# Altium PCB ImageSignalProcessor.PcbDoc
Units mil, origin at the board's own origin, x right, y up, seen from the top; angles counter-clockwise.
Board outline 4420 x 3000 mil, 2 copper layers (Top Layer, Bottom Layer); 17 components, 63 nets, 234 pads, 418 vias.
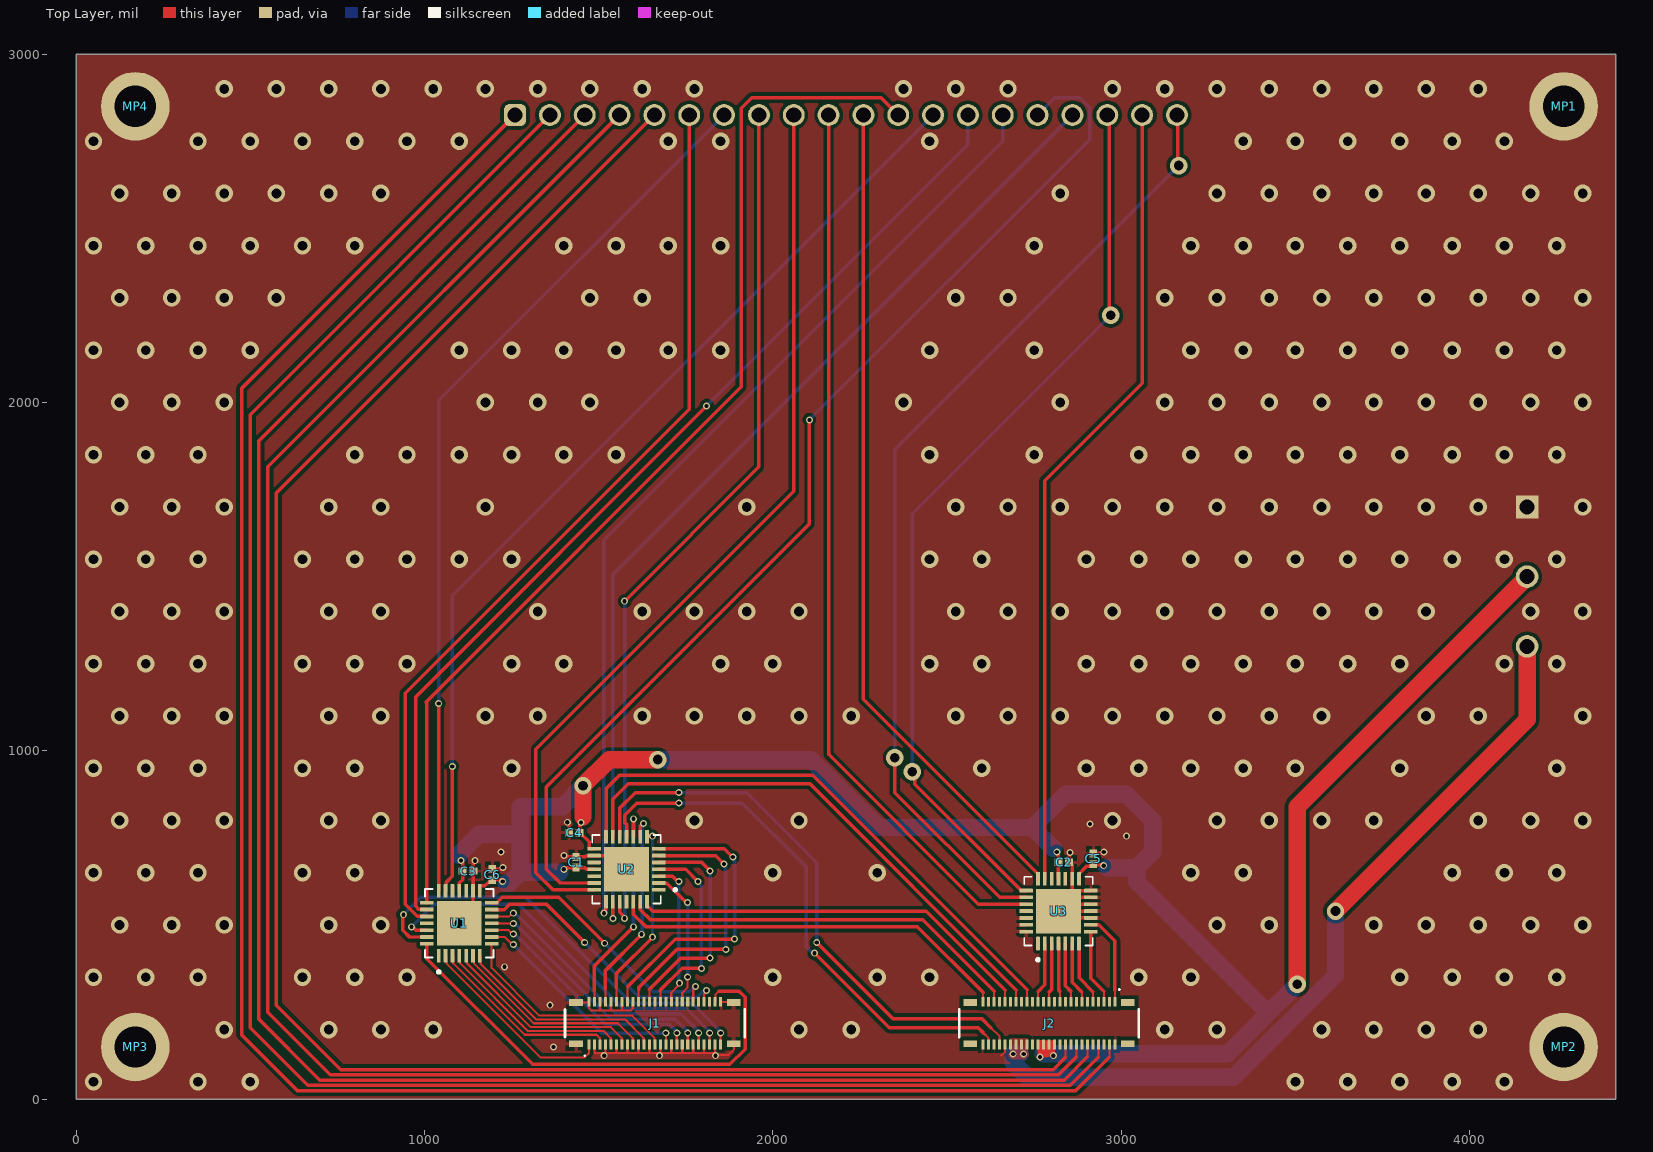
[diagram p0: Top Layer view]
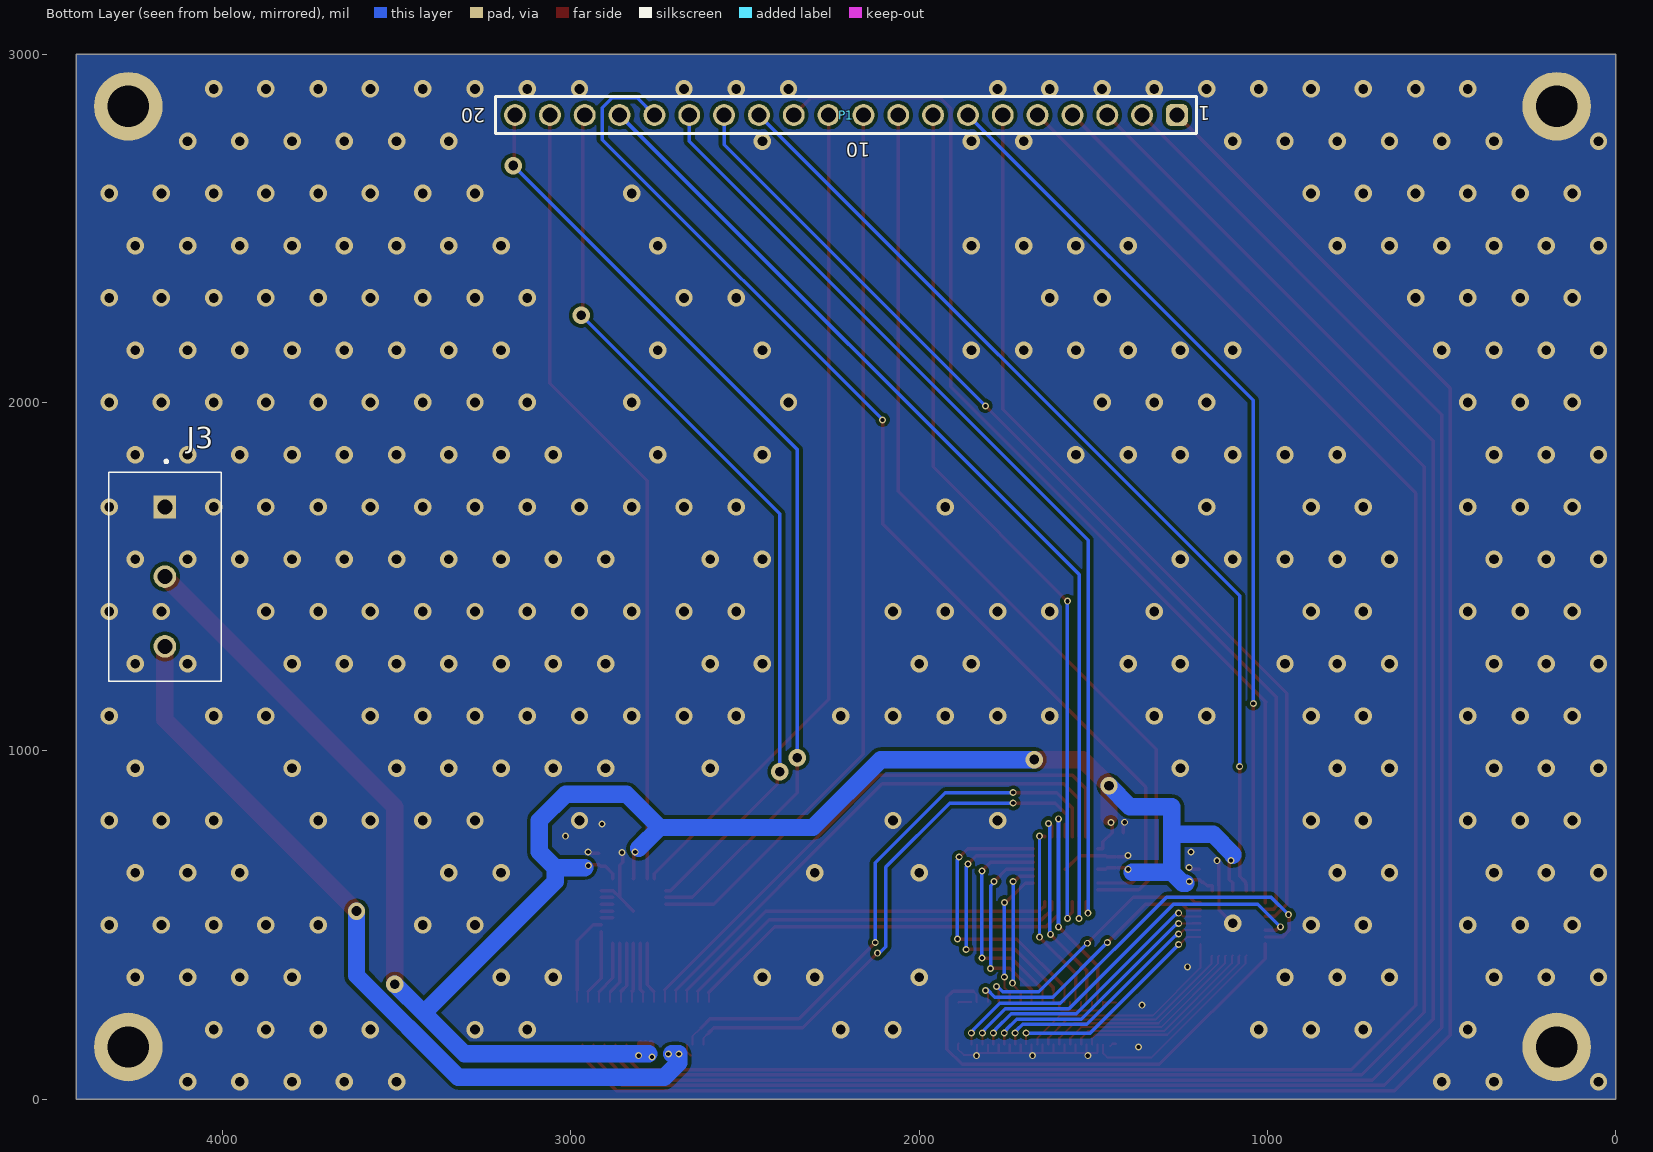
[diagram p1: Bottom Layer view, seen from below]

## Layer stack, top to bottom
Top Solder: solder mask 0.4, Solder Resist, Dk 3.5
Top Layer: signal copper 1.4
Dielectric 1: dielectric 12.6, FR-4, Dk 4.8
Bottom Layer: signal copper 1.4
Bottom Solder: solder mask 0.4, Solder Resist, Dk 3.5

## Board outline
0,0 0,3000 4420,3000 4420,0

## Design rules (kind name [scope] priority, off if disabled: settings)
Clearance [All] p1: gap=10 ignorepadtopadclearanceinfootprint=FALSE except(0: Arc-Hole Track-Hole SMDPad-Hole THPad-Hole Via-Hole Fill-Hole Poly-Hole Region-Hole Text-Hole; 5: Arc-Arc Arc-Track Track-Track SMDPad-SMDPad; 8: Arc-SMDPad Track-SMDPad; 13: Arc-THPad Track-THPad; 20: SMDPad-THPad)
HoleSize [All] p1: absolutevalues=TRUE maxlimit=248.03 minlimit=0.98 maxpercent=80.000 minpercent=20.000
MinimumSolderMaskSliver [All] p1: minsoldermaskwidth=3.15
PlaneClearance [All] p1: clearance=5
PlaneConnect [All] p1: planeconnectstyle=Direct reliefexpansion=20 reliefentries=4 reliefconductorwidth=10 reliefairgap=10
PolygonConnect PolygonConnect_5V [InNet('+5')] p1: connectstyle=Direct reliefconductorwidth=10 reliefentries=4 polygonreliefangle="90 Angle" airgapwidth=10
PolygonConnect PolygonConnect_VCC [InNet('VCC')] p2: connectstyle=Direct reliefconductorwidth=10 reliefentries=4 polygonreliefangle="90 Angle" airgapwidth=10
PolygonConnect PolygonConnect_GND [InNet('GND')] p3: thpad.connectstyle=Direct thpad.reliefconductorwidth=10 thpad.reliefentries=4 thpad.polygonreliefangle="90 Angle" thpad.airgapwidth=10 smdpad.connectstyle=Relief smdpad.reliefconductorwidth=10 smdpad.reliefentries=4 smdpad.polygonreliefangle="90 Angle" smdpad.airgapwidth=10 via.connectstyle=Direct via.reliefconductorwidth=10 via.reliefentries=4 via.polygonreliefangle="90 Angle" via.airgapwidth=10
PolygonConnect [All] p4: connectstyle=Relief reliefconductorwidth=10 reliefentries=4 polygonreliefangle="90 Angle" airgapwidth=10
RoutingVias [All] p1: holewidth=28 width=50 viastyle="Through Hole" minholewidth=12 minwidth=20 maxholewidth=28 maxwidth=50
SolderMaskExpansion SolderMaskExpansion_Connector [HasFootprint('51338-1074')] p1: expansion=3.7 istentingtop=FALSE
SolderMaskExpansion [All] p2: expansion=2 istentingtop=FALSE
Width [All] p1: maxlimit=100 minlimit=5 preferedwidth=10 minimp=50.000000 maximp=50.000000 favimp=50.000000
26 further rules are at their usual default settings.

## Classes and differential pairs
component class ImageSignalProcessor: J1 J2 J3 MP1 MP2 MP3 MP4 P1
component class ADC: C1 C2 C3 C4 C5 C6 U1 U2 U3

## Components (designator, comment, footprint, x,y, rotation, side; value= is the part's Value field where it differs from the comment)
C1 "Capacitor 0.1 uF +/- 5% 16 V 0402" CAPC1005X56X25LL10T15 1435,680 r270 top value=100nF
C2 "Capacitor 0.1 uF +/- 5% 16 V 0402" CAPC1005X56X25LL10T15 2835,680 r180 top value=100nF
C3 "Capacitor 0.1 uF +/- 5% 16 V 0402" CAPC1005X56X25LL10T15 1125,655 r180 top value=100nF
C4 "Capacitor 0.1 uF +/- 5% 16 V 0402" CAPC1005X56X25LL10T15 1430,765 r0 top value=100nF
C5 "Capacitor 0.1 uF +/- 5% 16 V 0402" CAPC1005X56X25LL10T15 2920,690 r270 top value=100nF
C6 "Capacitor 0.1 uF +/- 5% 16 V 0402" CAPC1005X56X25LL10T15 1195,645 r270 top value=100nF
J1 "51338-1074" 51338-1074 1661.26,218.23 r0 top locked
J2 "51338-1074" 51338-1074 2792.76,218.23 r180 top locked
J3 "3 Pin Screw Terminal" TE_282837-3 4165,1500 r270 bottom locked
MP1 "M3 MOUNTING HOLE" "M3 MOUNTING HOLE"#1 8105,2405 r0 top
MP2 "M3 MOUNTING HOLE" "M3 MOUNTING HOLE"#2 7850,2405 r0 top locked
MP3 "M3 MOUNTING HOLE" "M3 MOUNTING HOLE"#3 7595,2405 r0 top locked
MP4 "M3 MOUNTING HOLE" "M3 MOUNTING HOLE"#4 7340,2405 r0 top
P1 "61302011121" 61302011121 2210,2825 r0 bottom locked
U1 "16 Channel ADC" QFN50P500X500X80-29N 1100,505 r90 top
U2 "16 Channel ADC" QFN50P500X500X80-29N 1580,660 r180 top
U3 "16 Channel ADC" QFN50P500X500X80-29N 2820,540 r90 top

## Footprints (in the part's own frame and the unit in brackets; to place one, negate y for a bottom-side part, rotate by r counter-clockwise, add the part's x,y. Pads: shape width x height; smd on the part's side, far side on the other; paste and mask are expansions set on the pad)
51338-1074 [mm]
  rect 0.22x0.7 smd: 1(-4.8,-1.55) 2(-4.8,1.55) 3(-4.4,-1.55) 4(-4.4,1.55) 5(-4,-1.55) 6(-4,1.55) 7(-3.6,-1.55) 8(-3.6,1.55) 9(-3.2,-1.55) 10(-3.2,1.55) 11(-2.8,-1.55) 12(-2.8,1.55) 13(-2.4,-1.55) 14(-2.4,1.55) 15(-2,-1.55) 16(-2,1.55) 17(-1.6,-1.55) 18(-1.6,1.55) 19(-1.2,-1.55) 20(-1.2,1.55) 21(-0.8,-1.55) 22(-0.8,1.55) 23(-0.4,-1.55) 24(-0.4,1.55) 25(0,-1.55) 26(0,1.55) 27(0.4,-1.55) 28(0.4,1.55) 29(0.8,-1.55) 30(0.8,1.55) 31(1.2,-1.55) 32(1.2,1.55) 33(1.6,-1.55) 34(1.6,1.55) 35(2,-1.55) 36(2,1.55) 37(2.4,-1.55) 38(2.4,1.55) 39(2.8,-1.55) 40(2.8,1.55) 41(3.2,-1.55) 42(3.2,1.55) 43(3.6,-1.55) 44(3.6,1.55) 45(4,-1.55) 46(4,1.55) 47(4.4,-1.55) 48(4.4,1.55) 49(4.8,-1.55) 50(4.8,1.55)
  rect 1x0.5 smd: MP1(-5.75,-1.5) MP2(-5.75,1.5) MP3(5.75,-1.5) MP4(5.75,1.5)
  silkscreen extent -6.55,-2.42 6.55,1, body extent -6.55,-1.7 6.55,1.7, height 1.33
61302011121 [mm] "Pin Header, pitch 2.54 mm, THT, Vertical, single row, 20p"
  rrect50% 1.6x1.6 hole 1.1: 1(-24.13,0)
  round 1.6 hole 1.1: 2(-21.59,0) 3(-19.05,0) 4(-16.51,0) 5(-13.97,0) 6(-11.43,0) 7(-8.89,0) 8(-6.35,0) 9(-3.81,0) 10(-1.27,0) 11(1.27,0) 12(3.81,0) 13(6.35,0) 14(8.89,0) 15(11.43,0) 16(13.97,0) 17(16.51,0) 18(19.05,0) 19(21.59,0) 20(24.13,0)
  silkscreen extent -25.55,-1.35 25.55,1.35, body extent -25.4,-1.27 25.4,1.27, height 8.57
CAPC1005X56X25LL10T15 [mm] "Chip Capacitor, 2-Leads, Body 1.10x0.60mm, IPC High Density"
  rect 0.58x0.54 smd: 1(-0.39,0) 2(0.39,0)
  body extent -0.55,-0.3 0.55,0.3, height 0.56
"M3 MOUNTING HOLE"#1 [mm]
  round 5 hole 3: 1(-97.409,11.303)
"M3 MOUNTING HOLE"#2 [mm]
  round 5 hole 3: 1(-90.932,-57.277)
"M3 MOUNTING HOLE"#3 [mm]
  round 5 hole 3: 1(-188.595,-57.277)
"M3 MOUNTING HOLE"#4 [mm]
  round 5 hole 3: 1(-182.118,11.303)
QFN50P500X500X80-29N [mm]
  rrect25% 0.99x0.27 smd: 1(-2.36,1.5) 2(-2.36,1) 3(-2.36,0.5) 4(-2.36,0) 5(-2.36,-0.5) 6(-2.36,-1) 7(-2.36,-1.5) 15(2.36,-1.5) 16(2.36,-1) 17(2.36,-0.5) 18(2.36,0) 19(2.36,0.5) 20(2.36,1) 21(2.36,1.5)
  rrect25% 0.27x0.99 smd: 8(-1.5,-2.36) 9(-1,-2.36) 10(-0.5,-2.36) 11(0,-2.36) 12(0.5,-2.36) 13(1,-2.36) 14(1.5,-2.36) 22(1.5,2.36) 23(1,2.36) 24(0.5,2.36) 25(0,2.36) 26(-0.5,2.36) 27(-1,2.36) 28(-1.5,2.36)
  rect 3.25x3.25 smd paste-0.595: 29(0,0)
  silkscreen extent -3.65,-2.5 2.5,2.5, body extent -2.5,-2.5 2.5,2.5, height 0.8
TE_282837-3 [mm]
  rect 1.65x1.65 hole 1.1: 1(-5.08,0)
  round 1.65 hole 1.1: 2(0,0) 3(5.08,0)
  silkscreen extent -8.5,-4.1 7.62,4.1, body extent -8.3,-4.14 7.54,4.06, height 10.25

## Part data
C1 C2 C3 C4 C5 C6: library part CMP-001-00001-6, "Chip Capacitor, 0.1 uF, +/- 5%, 16 V, 0402 (1005 Metric)", Capacitor Type=Ceramic, Case/Package=0402, Max Operating Temperature=125°C, Min Operating Temperature=-55°C, Tolerance=5%, Voltage Rating=16V, Mounting Technology=SM, Pins=2, RoHS Compliant=True
J1 J2: "Board Connector, 100 Contact(s), 2 Row(s), Female, Straight, 0.016 inch Pitch, Surface Mount Terminal, Locking, Black Insulator, Receptacle", Contact Resistance=40mR, Flammability Rating="UL94 V-0", Insulation Color=Black, Insulation Resistance=100MR, Manufacturer=Molex, Max Operating Temperature=85°C, Min Operating Temperature=-25°C, Rated Current (Signal)=300mA, Supplier Part Number=538-51338-1074, Board Mounting Option="FITTING NAIL", Body Breadth=0.134inch, Body Depth=0.053inch, Body Length=0.909inch, Body/Shell Style=RECEPTACLE, Category="Headers and Wire Housings", ComponentLink1Description=https://datasheet.ciiva.com:443/pdfs/VipMasterIC/IC/MOLE/MOLE-S-A0003536377/MOLE-S-A0003536377-1.pdf?src-supplier=IHS+Markit, ComponentLink1URL=https://datasheet.ciiva.com:443/pdfs/VipMasterIC/IC/MOLE/MOLE-S-A0003536377/MOLE-S-A0003536377-1.pdf?src-supplier=IHS+Markit, ComponentLink2Description=https://datasheet.ciiva.com/5129/0513381074-pcb-receptacles-149270-5129725.pdf?src-supplier=Mouser, ComponentLink2URL=https://datasheet.ciiva.com/5129/0513381074-pcb-receptacles-149270-5129725.pdf?src-supplier=Mouser, ComponentLink3Description=https://datasheet.ciiva.com/46409/1597556-46409754.pdf?src-supplier=Element14, ComponentLink3URL=https://datasheet.ciiva.com/46409/1597556-46409754.pdf?src-supplier=Element14, Connector Type="BOARD CONNECTOR", Contact Finish - Mating=GOLD, Contact Finish - Termination=GOLD, Contact Gender=Female, Contact Pattern=RECTANGULAR, DIN Conformance=No, Filter Feature=No, IEC Conformance=No, Insulation Material=Polymer, JESD-609 Code=e4, Manufacturer Part Number=51338-1074, Mating Contact Pitch=0.016inch, Mating Contact Row Spacing=0.043inch, Mating Information="MULTIPLE MATING PARTS AVAILABLE", MIL Conformance=No, Mixed Contacts=No, Mounting Option 1=LOCKING, Mounting Style=STRAIGHT, Mounting Technology=Board, Number Of Connectors=1, Number of Contacts=100, Number Of PCB Rows=2, Number of Rows Loaded=2, Option="General Purpose", PCB Contact Pattern=RECTANGULAR, PCB Contact Row Spacing=1.4986mm, Pricing="1=3.42, 10=3.08, 50=3.08, 100=2.57, 500=2.56, 1000=2.27, 10000=2.27 (USD)", Reach SVHC Compliant=Yes, Reference Standard=UL, Reliability=COMMERCIAL, RoHS=Yes, RoHS Compliant=Yes, Stock=1434, Supplier=Mouser, Terminal Pitch=0.4mm, Termination=SMD/SMT
J3: library part 282837-3, "Modular Terminal Block, 13.5A, 1.5mm2, 1 Row(s), 1 Deck(s)", Current Rating=13.5A, Manufacturer="TE Connectivity", Manufacturer Series=282837, Supplier Part Number=3579695, Voltage Rating=300V, Category="Terminal Blocks", ComponentLink1Description=https://www.te.com:443/usa-en/product-282837-3.html?src-supplier=IHS+Markit, ComponentLink1URL=https://www.te.com:443/usa-en/product-282837-3.html?src-supplier=IHS+Markit, ComponentLink2Description=https://datasheet.ciiva.com/16305/eng-cs-1308389-eurostyle-terminal-blocks-0607-16305250.pdf?src-supplier=Future+Electronics, ComponentLink2URL=https://datasheet.ciiva.com/16305/eng-cs-1308389-eurostyle-terminal-blocks-0607-16305250.pdf?src-supplier=Future+Electronics, ComponentLink3Description=https://datasheet.ciiva.com/11758/0900766b80e7dc97-11758673.pdf?src-supplier=Rs, ComponentLink3URL=https://datasheet.ciiva.com/11758/0900766b80e7dc97-11758673.pdf?src-supplier=Rs, ComponentLink4Description=https://datasheet.ciiva.com/30149/eng-cs-1308389-eurostyle-terminal-blocks-0607-30149775.pdf?src-supplier=Onlinecomponents.com, ComponentLink4URL=https://datasheet.ciiva.com/30149/eng-cs-1308389-eurostyle-terminal-blocks-0607-30149775.pdf?src-supplier=Onlinecomponents.com, ComponentLink5Description=https://datasheet.ciiva.com/3141/eng-cs-1308389-eurostyle-terminal-blocks-0607-3141580.pdf?src-supplier=Avnet, ComponentLink5URL=https://datasheet.ciiva.com/3141/eng-cs-1308389-eurostyle-terminal-blocks-0607-3141580.pdf?src-supplier=Avnet, ComponentLink6Description=https://datasheet.ciiva.com/7978/1650926-7978570.pdf?src-supplier=Element14, ComponentLink6URL=https://datasheet.ciiva.com/7978/1650926-7978570.pdf?src-supplier=Element14, ComponentLink7Description=https://datasheet.ciiva.com/823/eng-cd-282837-g3-823447.pdf?src-supplier=Digi-Key, ComponentLink7URL=https://datasheet.ciiva.com/823/eng-cd-282837-g3-823447.pdf?src-supplier=Digi-Key, ComponentLink8Description=https://datasheet.ciiva.com/18620/eng-cd-282837-g3-18620919.pdf?src-supplier=Digi-Key, ComponentLink8URL=https://datasheet.ciiva.com/18620/eng-cd-282837-g3-18620919.pdf?src-supplier=Digi-Key, Fastening Method=SCREW, Manufacturer Part Number=282837-3, Mounting Technology=Board, Number of Decks=1, Number of Rows=1, Number of Ways=3, Pricing="1=0.68, 50=0.66, 200=0.625, 500=0.61, 2000=0.56 (USD)", Reach SVHC Compliant=No, RoHS=Yes, RoHS Compliant=Yes, Safety Approval=UL, Stock=18400, Supplier="Future Electronics", Terminal and Terminal Block Type="MODULAR TERMINAL BLOCK", Wire Cross Section=1.5mm2, Wire/Cable Gauge=15AWG
P1: library part CMP-1502-01102-2, Color=Black, Contact Resistance=20mΩ, Current Rating=3A, Operating Supply Voltage=250V, Connector Type="Male Pin", Contact Material=Copper, Contact Mating Length=5.9944mm, Contact Plating=Gold, Gender=Male, Lead Pitch=2.54mm, Mount="Through Hole", NexarPartId=32855554, Number of Contacts=20, Number of Pins=20, Number of Positions=20, Number of Rows=1, Orientation=Vertical, Packaging=Bulk, Pitch=2.54mm, REACH SVHC=Unknown, RoHS=Compliant, Termination=Solder
U1 U2 U3: library part MAX1031BETI+T, "ADC, Successive Approximation, 10-Bit, 1 Func, 16 Channel, Serial Access, BICMOS", Case/Package=HVQCCN, Manufacturer=Maxim, Max Input Voltage (AC)=1.26V, Max Operating Temperature=85°C, Min Input Voltage (AC)=-1.24V, Min Operating Temperature=-40°C, Nominal Supply Voltage=2.7V, Package Shape=Square, Package Style="CHIP CARRIER, HEAT SINK/SLUG, VERY THIN PROFILEMeter", Peak Reflow Temperature (Cel)=260°C, Power Supplies=3/3.3V, Supplier Part Number=MAX1031BETI+T-ND, Temperature Grade=INDUSTRIAL, Time @ Peak Reflow Temperature-Max (s)=30s, Category="Analog to Digital Converters (ADCs)", Channels=1, ComponentLink1Description=https://datasheet.ciiva.com:443/pdfs/VipMasterIC/IC/MAXM/MAXMS12063/MAXMS12063-1.pdf?src-supplier=IHS+Markit, ComponentLink1URL=https://datasheet.ciiva.com:443/pdfs/VipMasterIC/IC/MAXM/MAXMS12063/MAXMS12063-1.pdf?src-supplier=IHS+Markit, ComponentLink2Description=https://datasheet.ciiva.com/1317/max1027-max1031-1317413.pdf?src-supplier=Digi-Key, ComponentLink2URL=https://datasheet.ciiva.com/1317/max1027-max1031-1317413.pdf?src-supplier=Digi-Key, ComponentLink3Description=https://datasheet.ciiva.com/13060/max1027-max1031-94739-13060424.pdf?src-supplier=Mouser, ComponentLink3URL=https://datasheet.ciiva.com/13060/max1027-max1031-94739-13060424.pdf?src-supplier=Mouser, Conversion Time-Max=3.5us, Converter Type="SUCCESSIVE APPROXIMATION", Height - Seated (Max)=0.8mm, JESD-609 Code=e3, Length=5mm, Linearity Error-Max (EL)=0.0977%, Manufacturer Part Number=MAX1031BETI+T, Moisture Sensitivity Level=1, Number of Analog In Channels=16, Number of Bits=10, Output Bit Code="BINARY, 2''S COMPLEMENT BINARY", Output Format=Serial, Pins=28, Pricing="2500=12.50138 (USD)", Qualification Status="Not Qualified", Reach SVHC Compliant=Yes, RoHS=Yes, RoHS Compliant=Yes, Sample Rate (Hz)=300kHz, Sample-and-Hold/Track-and-Hold=TRACK, Supplier=Digi-Key, Surface Mount=Yes, Technology=BICMOS, Terminal Finish=Tin, Terminal Form="No Lead", Terminal Pitch=0.5mm, Terminal Position=QUAD, Width=5mm

## Via types
v1: diameter 50, hole 28, Top Layer to Bottom Layer, 347 vias
v2: diameter 20, hole 12, Top Layer to Bottom Layer, 71 vias

## Nets (pads, with @x,y where several pads share a name; then routed paths per layer and width w, separated by ;. In a path a pad name is that pad's centre, name@x,y a point inside that pad or via, vN(x,y) a via of type N, cw(c..) or ccw(c..) an arc to the next point about the centre after c; other vN are vias at no path point)
+3V3: C1.2 C2.2 C3.2 C4.2 C5.2 C6.2 J2.24 J2.26 J2.28 J2.30 J3.2 U1.15 U1.18 U2.15 U2.18 U3.15 U3.18 | length 6472.7
  Top Layer w10: U1.18 1100.32,598.23 1100.32,620.95 1109.65,630.28 C3.2 ; v2(1105,685) 1109.29,680.71 C3.2@1109.29,655.35 ; U1.15 1159.06,612.09 1159.37,612.4 1173.54,612.4 1184.37,623.23 1189.37,623.23 1195,628.86 C6.2 1220.35,629.65 v2(1224.65,625.35) ; v2(1400,660) 1404.29,664.29 C1.2@1429.65,664.29 ; C1.2 1459.72,664.65 1464.05,660.32 1486.77,660.32 U2.18 ; v2@1445.35,790.35 C4.2 1446.14,765 1472.6,738.54 1472.6,719.37 1472.91,719.06 U2.15 ; v2(2815,710) 2819.29,705.71 C2.2@2819.29,680.35 ; C2.2 2819.82,679.82 2819.82,633.09 U3.18 ; U3.15 2879.06,647.09 2900.2,668.23 2914.37,668.23 2920,673.86 C5.2 ; C5.2@2920.31,674.33 2921.49,673.16 2944.14,673.16 2946.94,670.35 v2(2949.65,670.35)
  Top Layer w20: v2(2767,121) 2770,124 2770,160 ; 2785,130 2785,160 ; 2800,160 2800,130 v2(2805,125)
  Top Layer w50: 1455,810 v1(1455,900) 1530,975 v1(1670,975) ; v1(3505,330) 3505,840 J3.2
  Bottom Layer w50: 1099.65,700 1099.65,703.29 1156.36,760 1270,760 1275,765 ; 1235,620 1243.64,620 1275,651.36 ; 1388.64,651.36 1275,651.36 ; v1(1455,900) 1395,840 1275,840 1275,765 ; v1(1670,975) 2110,975 2305,780 2745,780 ; 2776,130 3305,130 3422.5,247.5 ; 2805,720 2745,780 ; 2960,665 3045,665 ; v1(3505,330) 3422.5,247.5 ; 1275,651.36 1275,765 ; 2745,780 2840,875 3015,875 3090,800 3090,710 3045,665 ; 3045,665 3045,625 3422.5,247.5
  other v2: 1449.65,794.65
\E\O\C\1: P1.6 U1.24 | length 2679.8
  Top Layer w10: U1.24 1006.77,525 979.68,525 945,559.68 945,623.53 944.6,623.93 944.6,1164.85 1760,1980.25 P1.6
\E\O\C\2: P1.8 U2.24 | length 2520.2
  Top Layer w10: U2.24 1560.32,536.19 1574.5,522 v2(1574.5,519.3) ; v2(1574.5,1429.5) 1960,1815 P1.8
  Bottom Layer w10: v2(1574.5,1429.5) v2(1574.5,519.3) v2@1575.7,519.3
\E\O\C\3: P1.10 U3.24 | length 2580.3
  Top Layer w10: P1.10 2160,990 2590,560 2726.77,560 U3.24
COL_0: J1.1 U1.2 | length 574.3
  Top Layer w6: U1.2 1062.94,409.77 1062.94,389.88 1332.82,120 1460,120 1472.28,132.28 J1.1
COL_1: J1.5 U1.3 | length 551.2
  Top Layer w6: U1.3 1082.63,409.77 1082.63,389.88 1287.51,185 1407.78,185 1465.39,185.02 1493.9,185 1503.36,175.54 1503.36,157.62 J1.5
COL_2: J1.9 U1.4 | length 563
  Top Layer w6: U1.4 1102.32,409.77 1102.32,389.88 1296.19,196 1403.23,196 1469.95,196.02 1514.4,196 1534.86,175.54 1534.86,157.62 J1.9
COL_3: J1.13 U1.5 | length 574.8
  Top Layer w6: U1.5 1122,409.77 1122,389.88 1304.88,207 1398.67,207 ; 1398.69,207.02 1474.51,207.02 1534.89,207 1566.35,175.54 1566.35,157.62 J1.13
COL_4: J1.17 U1.6 | length 586.6
  Top Layer w6: U1.6 1141.69,409.77 1141.69,389.88 1313.56,218 1394.11,218 ; 1394.13,218.02 1555.38,218.02 1597.85,175.54 1597.85,157.62 J1.17
COL_5: J1.21 U1.7 | length 599.2
  Top Layer w6: U1.7 1160.86,410.28 1160.86,389.14 1321,229 1389.56,229 1575.87,229.02 1629.35,175.54 1629.35,157.62 J1.21
COL_6: J1.25 U1.8 | length 638.8
  Top Layer w6: U1.8 1192.91,377.09 1329.98,240.02 1596.37,240.02 1660.84,175.54 1660.84,157.62 J1.25
COL_7: J1.29 U1.9 | length 647.4
  Top Layer w6: U1.9 1230.84,465.63 1252.47,444 v2(1255,444) ; v2(1692.76,190) J1.29 J1.29@1693.17,157.62
  Bottom Layer w10: v2(1255,444) 1509,190 v2(1692.76,190)
COL_8: J1.33 U1.10 | length 688.7
  Top Layer w6: U1.10 1241.16,485.32 1252.47,474 v2(1255,474) ; J1.33 v2(1724.25,190)
  Bottom Layer w10: v2(1255,474) 1257.71,474 1262.71,469 1265.36,469 1519.36,215 1703.11,215 1717.76,200.36 1717.76,199.2 1724.25,192.71 v2(1724.25,190)
COL_9: J1.37 U1.11 | length 728.4
  Top Layer w6: U1.11 1215.4,505 1216.4,504 v2(1255,504) ; J1.37 v2(1755.75,190)
  Bottom Layer w10: v2(1255,504) 1257.71,504 1262.71,499 1265.36,499 1534.36,230 1719.61,230 1749.25,200.36 1749.25,199.2 1755.75,192.71 v2(1755.75,190)
COL_10: J1.41 U1.12 | length 775.7
  Top Layer w6: U1.12 1243.16,524.68 1252.47,534 v2(1255,534) ; J1.41 v2(1787.24,190)
  Bottom Layer w10: v2(1255,534) 1257.71,534 1262.71,529 1265.36,529 1549.36,245 1736.1,245 1780.75,200.36 1780.75,199.2 1787.24,192.71 v2(1787.24,190)
COL_11: J1.45 U1.26 | length 1119.1
  Top Layer w6: J1.45 v2(1818.74,190)
  Top Layer w10: v2(963,495) 965.71,495 975.08,485.63 1006.77,485.63 U1.26
  Bottom Layer w10: v2(963,495) 1028,560 1270,560 1570,260 1752.6,260 1812.24,200.36 1812.24,199.2 1818.74,192.71 v2(1818.74,190)
COL_12: J1.49 U1.27 | length 1250.7
  Top Layer w6: J1.49 v2(1850.24,190)
  Top Layer w10: v2(939.66,529.66) 938,528 938,484.64 957.01,465.63 U1.27
  Bottom Layer w10: v2(939.66,529.66) 990,580 1290,580 1595,275 1769.1,275 1843.74,200.36 1843.74,199.2 1850.24,192.71 v2(1850.24,190)
COL_13: J1.48 U1.28 | length 1365.9
  Top Layer w6: J1.48 1834.91,279.67 1834.91,300.04 1840.07,305.21 1840.21,305.21 1845,310
  Top Layer w10: U1.28 1007.09,403.54 1310.62,100 1876.38,100 1920.32,143.95 1920.32,292.51 1902.83,310 1845,310
COL_14: J1.44 U1.13 | length 773.3
  Top Layer w6: J1.44 1802.99,302.21 1809.38,308.6 v2(1809.38,312.39)
  Top Layer w10: U1.13 1228.91,544.37 1243.54,559 1351,559 v2(1460,450)
  Bottom Layer w10: v2(1460,450) 1617.03,292.97 1782.97,292.97 v2@1805,315
COL_15: J1.40 U1.14 | length 757
  Top Layer w6: J1.40 1771.5,313.06 1777.81,319.38 v2(1777.81,323.17)
  Top Layer w10: U1.14 1207.09,564.06 1223.03,580 1385,580 v2(1517.32,447.68)
  Bottom Layer w10: v2(1517.32,447.68) 1657.03,307.97 1759.91,307.97 1775.11,323.17 v2(1777.81,323.17)
COL_16: J1.36 U2.2 | length 397.6
  Top Layer w6: J1.36 1740,305 1754.81,319.81 1754.81,350.35 v2(1755.65,351.18)
  Top Layer w10: U2.2 1673.23,620.31 1695.95,620.31 1749.35,566.91 1753.09,566.91 v2(1755,565)
  Bottom Layer w10: v2(1755,565) 1755.32,564.68 1755.32,351.51 v2(1755.65,351.18)
COL_17: J1.32 U2.3 | length 419.6
  Top Layer w6: J1.32 1708.5,305.87 1731.81,329.18 v2(1731.81,332.97)
  Top Layer w10: U2.3 1711.98,640.32 1727.29,625 v2(1730,625)
  Bottom Layer w10: v2(1730,625) 1730,334.78 v2(1731.81,332.97)
COL_18: J1.28 U2.4 | length 559.4
  Top Layer w6: J1.28 1677.01,310.69
  Top Layer w10: U2.4 1750,660 v2(1785,625) ; 1677.01,310.69 1677.01,313.52 1739.67,376.18 1793.82,376.18 v2(1795,375)
  Bottom Layer w10: v2(1785,625) 1785,622.29 1795,612.29 v2(1795,375)
COL_19: J1.24 U2.5 | length 655.1
  Top Layer w6: J1.24 1645.93,279.67 1645.93,315.93
  Top Layer w10: 1645.93,315.93 1735,405 v2(1820,405) ; U2.5 1795.32,679.68 v2(1820,655)
  Bottom Layer w10: v2(1820,405) v2(1820,655)
COL_20: J1.20 U2.6 | length 781
  Top Layer w6: J1.20 1614.43,279.67 1614.43,314.22
  Top Layer w10: 1614.43,314.22 1614.43,319.43 1725,430 v2(1865,430) ; U2.6 1835.63,699.37 v2(1860,675)
  Bottom Layer w10: v2(1860,675) 1860,672.29 1865,667.29 v2(1865,430)
COL_21: J1.16 U2.7 | length 866.8
  Top Layer w6: J1.16 1582.94,279.67 1582.94,322.94
  Top Layer w10: 1582.94,322.94 1719.38,459.38 1889.38,459.38 v2(1890,460) ; U2.7 1860.94,719.06 v2(1885,695)
  Bottom Layer w10: v2(1885,695) 1885,692.29 1890,687.29 v2(1890,460)
COL_22: J1.12 U2.8 | length 536.2
  Top Layer w6: J1.12 1551.02,320.14
  Top Layer w10: 1551.02,320.14 1551.02,361.02 v2(1655,465) ; U2.8 1639.06,754.68 1639.37,755 v2(1654.19,755)
  Bottom Layer w10: v2(1654.19,755) 1654.6,754.6 1654.6,465.4 v2(1655,465)
COL_23: J1.8 U2.9 | length 602.1
  Top Layer w6: J1.8 1519.53,315
  Top Layer w10: 1519.53,315 1519.53,369.53 v2(1623.35,473.35) ; U2.9 1619.37,784.59 1619.5,784.59 1626.49,791.58 v2(1629.19,791.58)
  Bottom Layer w10: v2(1623.35,473.35) 1625,475 1625,784.68 1629.19,788.87 v2(1629.19,791.58)
COL_24: J1.4 U2.10 | length 624.3
  Top Layer w6: J1.4 1488.03,311.14
  Top Layer w10: 1488.03,311.14 1488.03,383.03 v2(1600,495)
  Top Layer w11: U2.10 1599.87,753.1 1599.87,778.37 1600,778.5 v2(1600,805)
  Bottom Layer w11: v2(1600,495) v2(1600,805)
COL_25: J2.48 U2.11 | length 1555
  Top Layer w6: 2604.59,190.06 2619.53,175.12 J2.48
  Top Layer w10: U2.11 1580,788.88 1575,793.88 1575,815.36 1609.64,850 v2(1730,850) ; v2(2120,419.23) 2334.23,205 2589.65,205 2604.59,190.06
  Bottom Layer w10: v2(1730,850) 1912.57,850 2096,666.57 2096,437.57 2114.34,419.23 v2(2120,419.23)
COL_26: J2.44 U2.12 | length 1639
  Top Layer w6: 2625.72,205.7 2651.02,180.4 J2.44
  Top Layer w10: U2.12 1560,753.23 1560,835 1605,880 v2(1730,880) ; v2(2126,450) 2345,231 2600.42,231 2625.72,205.7
  Bottom Layer w10: v2(1730,880) 1925,880 2126,679 v2(2126,450)
COL_27: J2.49 U2.26 | length 1160.2
  Top Layer w6: J2.49 2603.78,306.22
  Top Layer w10: U2.26 1599.68,531.17 1635.86,495 2415,495 2603.78,306.22
COL_28: J2.45 U2.27 | length 1166.3
  Top Layer w6: J2.45 2635.28,309.72
  Top Layer w10: U2.27 1619.69,566.77 1619.69,544.05 1648.73,515 2430,515 2635.28,309.72
COL_29: J2.41 U2.28 | length 1175.1
  Top Layer w6: J2.41 2666.77,313.23
  Top Layer w10: U2.28 1639.06,552.91 1639.37,552.6 1642.4,552.6 1655,540 2440,540 2666.77,313.23
COL_30: J2.37 U2.13 | length 1562.9
  Top Layer w6: J2.37 2698.27,313.27
  Top Layer w10: U2.13 1540.94,753.23 1540.94,860.94 1585,905 2106.54,905 2698.27,313.27
COL_31: J2.33 U2.14 | length 1653.4
  Top Layer w6: J2.33 2729.76,314.76
  Top Layer w10: U2.14 1521.26,753.23 1521.26,891.26 1560,930 2114.53,930 2729.76,314.76
COL_32: J2.29 U3.2 | length 175.9
  Top Layer w6: J2.29 2761.26,308.74
  Top Layer w10: 2761.26,308.74 2780.63,328.11 U3.2
COL_33: J2.25 U3.3 | length 171
  Top Layer w6: J2.25 2792.76,307.24
  Top Layer w10: 2792.76,307.24 2800.32,314.8 U3.3
COL_34: J2.21 U3.4 | length 169.6
  Top Layer w6: J2.21 2824.25,309.25
  Top Layer w10: U3.4 2820,313.5 2824.25,309.25
COL_35: J2.17 U3.5 | length 174.5
  Top Layer w6: J2.17 2855.75,309.25
  Top Layer w10: U3.5 2839.68,325.32 2855.75,309.25
COL_36: J2.13 U3.6 | length 179.4
  Top Layer w6: J2.13 2887.24,307.76
  Top Layer w10: U3.6 2859.37,335.63 2887.24,307.76
COL_37: J2.9 U3.7 | length 184.3
  Top Layer w6: J2.9 2918.74,308.74
  Top Layer w10: U3.7 2879.06,348.43 2918.74,308.74
COL_38: J2.5 U3.8 | length 217.2
  Top Layer w6: J2.5 2950.24,309.76
  Top Layer w10: U3.8 2912.91,347.09 2950.24,309.76
COL_39: J2.1 U3.9 | length 263.2
  Top Layer w6: J2.1 2981.73,313.27
  Top Layer w10: U3.9 2913.23,500.31 2935.95,500.31 2981.73,454.54 2981.73,313.27
CS1: P1.7 U1.21 | length 2566.4
  Top Layer w10: U1.21 v2(1040.94,1135.94)
  Bottom Layer w10: v2(1040.94,1135.94) 1040.94,2005.94 P1.7
CS2: P1.9 U2.21 | length 2668.9
  Top Layer w10: U2.21 1369.06,600.94 1320,650 1320,1005 2060,1745 P1.9
CS3: P1.11 U3.21 | length 2399.6
  Top Layer w10: P1.11 2260,1148.03 2760.94,647.09 U3.21
DIN1: P1.12 U1.22 | length 3139.7
  Top Layer w10: U1.22 1007.09,1137.51 1004.6,1140 1909.5,2044.9 1909.5,2844.49 1939.5,2874.5 2310.5,2874.5 P1.12
DIN2: P1.15 U2.22 | length 2800.7
  Top Layer w10: v2(1515,534.06) 1520.94,540 U2.22
  Bottom Layer w10: v2(1515,534.06) 1515,1605 2660,2750 P1.15
DIN3: P1.18 U3.22 | length 2610
  Top Layer w10: v1(2400,940) 2407.65,932.35 2407.65,904.31 2712.91,599.06 U3.22 ; P1.18 2965,2820 2965,2255 v1(2970,2250)
  Bottom Layer w10: v1(2400,940) 2400,1680 v1(2970,2250)
DOUT1: P1.14 U1.23 | length 2964.1
  Top Layer w10: U1.23 1006.77,544.69 984.05,544.69 974.6,554.13 974.6,1154.6 v2(1810,1990)
  Bottom Layer w10: v2(1810,1990) 2560,2740 P1.14
DOUT2: P1.17 U2.23 | length 2900.5
  Top Layer w10: U2.23 1540.63,519.54 v2(1541.03,519.14)
  Bottom Layer w10: v2@1541.03,518.97 v2(1541.03,519.14) 1541.03,1506.03 P1.17
DOUT3: P1.20 U3.23 | length 2786.2
  Top Layer w10: v1(2350,980) 2350,880.15 2650.78,579.37 U3.23 ; P1.20 3162.5,2822.5 3162.5,2682.5 v1(3165,2680)
  Bottom Layer w10: v1(2350,980) 2350,1865 v1(3165,2680)
GND: C1.1 C2.1 C3.1 C4.1 C5.1 C6.1 J1.2 J1.3 J1.6 J1.7 J1.10 J1.11 J1.14 J1.15 J1.18 J1.19 J1.22 J1.23 J1.26 J1.27 J1.30 J1.31 J1.34 J1.35 J1.38 J1.39 J1.42 J1.43 J1.46 J1.47 J1.50 J1.MP1 J1.MP2 J1.MP3 J1.MP4 J2.2 J2.3 J2.6 J2.7 J2.10 J2.11 J2.14 J2.15 J2.18 J2.19 J2.22 J2.23 J2.27 J2.31 J2.32 J2.35 J2.39 J2.42 J2.43 J2.46 J2.47 J2.50 J3.1 MP1.1 MP2.1 MP3.1 MP4.1 U1.16 U1.29 U2.16 U2.29 U3.10 U3.11 U3.12 U3.13 U3.14 U3.16 U3.26 U3.27 U3.28 U3.29 | length 1958.6
  Top Layer w6: J1.MP1 1444.72,159.17 J1.MP1@1451.57,152.33 ; J1.MP2 J1.2@1470.95,277.28 ; J1.2 1472.7,278.83 1472.7,260.92 1479.14,254.47 1505,254.47 ; 1488.03,132.42 1490,132.42 ; J1.3 1488.03,134.39 1490,132.42 ; J1.6 1503.78,255.69 1505,254.47 ; J1.7 1519.53,132.9 v2@1520,132.42 ; J1.10 1535.28,254.75 1535,254.47 ; 1551.02,134.39 J1.11 ; J1.14 1566.77,255.34 1565.9,254.47 ; 1582.52,134.39 J1.15 ; J1.18 1597.85,278.83 1597.85,260.92 1591.41,254.47 1565.9,254.47 ; 1614.02,134.39 J1.19 ; 1645.51,134.39 J1.23 ; v2@1677.01,134.39 J1.27 ; 1708.5,134.39 J1.31 ; 1740,134.39 J1.35 ; 1771.5,134.39 J1.39 ; 1802.99,134.39 J1.43 ; J1.47@1834.07,156.79 J1.47 v2@1834.49,134.39 ; J1.50 1885.67,279.25 J1.MP4 ; J1.MP3 1889.02,157.79 1889.02,143.85 1872.47,127.3 1837.3,127.3 v2(1835,125) 1835,127.3 1835,131.91 1834.49,132.42 1802.99,132.42 1771.5,132.42 1740,132.42 1708.5,132.42 1677.01,132.42 1645.51,132.42 1614.02,132.42 1582.52,132.42 1551.02,132.42 v2@1520,132.42 ; 2655,125 2666.77,136.77 J2.42 ; 1490,132.42 v2@1520,132.42 ; 1505,254.47 1535,254.47 ; 1535,254.47 1565.9,254.47
  Top Layer w10: v1(1100,505) 1139.37,544.37 U1.16 1139.37,612.09 1140.35,613.07 C3.1 1140.35,680.35 v2(1144.65,684.65) ; C6.1@1195.35,660.71 1220.71,660.71 v2(1225,665) ; v2(1400.35,699.65) 1404.65,695.35 C1.1@1430,695.35 ; v2(1410,795) 1414.29,790.71 C4.1@1414.29,765.35 ; C1.1 1460.35,695.35 1464.05,699.06 1486.77,699.06 U2.16 1540.63,699.37 U2.29 ; U3.29 U3.29@2859.37,579.37 ; v2(2853.16,708.16) 2853.16,705.45 2850.35,702.65 C2.1 2851.14,680 2859.37,671.77 U3.16 U3.29@2859.37,579.37 ; U3.29@2878.98,520.24 U3.10@2912.83,520.24 ; U3.29@2878.98,539.92 U3.11@2912.83,539.92 ; U3.29@2878.98,559.61 U3.12@2912.83,559.61 ; U3.29@2878.98,579.29 U3.13@2912.83,579.29 ; U3.14 2912.83,598.98 2878.98,598.98 U3.29@2859.37,579.37 ; C5.1@2920.35,705.71 2945.71,705.71 v2(2950,710)
  other v1: 50,50 350,50 500,50 3500,50 3650,50 3800,50 3950,50 4100,50 425,200 725,200 875,200 1025,200 2075,200 2225,200 3125,200 3275,200 3575,200 3725,200 3875,200 4025,200 50,350 200,350 350,350 650,350 800,350 950,350 2000,350 2300,350 2450,350 3050,350 3200,350 3800,350 3950,350 4100,350 4250,350 125,500 275,500 425,500 725,500 875,500 3275,500 3425,500 3725,500 3875,500 4025,500 4175,500 4325,500 50,650 200,650 350,650 650,650 800,650 2000,650 2300,650 3200,650 3350,650 3950,650 4100,650 4250,650 125,800 275,800 425,800 725,800 875,800 1775,800 2075,800 2975,800 3275,800 3425,800 3575,800 3725,800 4025,800 4175,800 4325,800 50,950 200,950 350,950 650,950 800,950 1250,950 2600,950 2900,950 3050,950 3200,950 3350,950 3500,950 3800,950 4250,950 125,1100 275,1100 425,1100 725,1100 875,1100 1175,1100 1325,1100 1625,1100 1775,1100 1925,1100 2075,1100 2225,1100 2525,1100 2675,1100 2825,1100 2975,1100 3125,1100 3275,1100 3425,1100 3575,1100 3875,1100 4025,1100 4325,1100 50,1250 200,1250 350,1250 650,1250 800,1250 950,1250 1250,1250 1400,1250 1850,1250 2000,1250 2450,1250 2600,1250 2900,1250 3050,1250 3200,1250 3350,1250 3500,1250 3650,1250 3800,1250 4100,1250 4250,1250 125,1400 275,1400 425,1400 725,1400 875,1400 1325,1400 1625,1400 1775,1400 1925,1400 2075,1400 2525,1400 2675,1400 2825,1400 2975,1400 3125,1400 3275,1400 3425,1400 3575,1400 3725,1400 3875,1400 4175,1400 4325,1400 50,1550 200,1550 350,1550 650,1550 800,1550 950,1550 1100,1550 1250,1550 2450,1550 2600,1550 2900,1550 3050,1550 3200,1550 3350,1550 3500,1550 3650,1550 3800,1550 3950,1550 4100,1550 4250,1550 125,1700 275,1700 425,1700 725,1700 875,1700 1175,1700 1925,1700 2525,1700 2675,1700 2825,1700 2975,1700 3125,1700 3275,1700 3425,1700 3575,1700 3725,1700 3875,1700 4025,1700 4325,1700 50,1850 200,1850 350,1850 800,1850 950,1850 1100,1850 1250,1850 1400,1850 1550,1850 2450,1850 2750,1850 3050,1850 3200,1850 3350,1850 3500,1850 3650,1850 3800,1850 3950,1850 4100,1850 4250,1850 125,2000 275,2000 425,2000 1175,2000 1325,2000 1475,2000 2375,2000 2825,2000 3125,2000 3275,2000 3425,2000 3575,2000 3725,2000 3875,2000 4025,2000 4175,2000 4325,2000 50,2150 200,2150 350,2150 500,2150 1100,2150 1250,2150 1400,2150 1550,2150 1700,2150 1850,2150 2450,2150 2750,2150 3200,2150 3350,2150 3500,2150 3650,2150 3800,2150 3950,2150 4100,2150 4250,2150 125,2300 275,2300 425,2300 575,2300 1475,2300 1625,2300 2525,2300 2675,2300 3125,2300 3275,2300 3425,2300 3575,2300 3725,2300 3875,2300 4025,2300 4175,2300 4325,2300 50,2450 200,2450 350,2450 500,2450 650,2450 800,2450 1400,2450 1550,2450 1700,2450 1850,2450 2750,2450 3200,2450 3350,2450 3500,2450 3650,2450 3800,2450 3950,2450 4100,2450 4250,2450 125,2600 275,2600 425,2600 575,2600 725,2600 875,2600 2825,2600 3275,2600 3425,2600 3575,2600 3725,2600 3875,2600 4025,2600 4175,2600 4325,2600 50,2750 350,2750 500,2750 650,2750 800,2750 950,2750 1100,2750 1700,2750 1850,2750 2450,2750 3350,2750 3500,2750 3650,2750 3800,2750 3950,2750 4100,2750 425,2900 575,2900 725,2900 875,2900 1025,2900 1175,2900 1325,2900 1475,2900 1625,2900 1775,2900 2375,2900 2525,2900 2675,2900 2975,2900 3125,2900 3275,2900 3425,2900 3575,2900 3725,2900 3875,2900 4025,2900
  other v2: 1515.89,125 1675,125 1370,150 1360,270 1230,380 1220,710 3015,755 2910,790
ROW_SELECT_1: J2.20 P1.5 | length 5397.8
  Top Layer w6: 2840,120 J2.20
  Top Layer w10: P1.5 575,1740 575,270 760,85 2805,85 2840,120
ROW_SELECT_2: J2.16 P1.4 | length 5446.4
  Top Layer w6: 2871.5,121.5 J2.16
  Top Layer w10: P1.4 550,1815 550,250 730,70 2820,70 2871.5,121.5
ROW_SELECT_3: J2.12 P1.3 | length 5495.7
  Top Layer w6: 2902.99,122.01 J2.12
  Top Layer w10: P1.3 525,1890 525,230 700,55 2835.98,55 2902.99,122.01
ROW_SELECT_4: J2.8 P1.2 | length 5549.1
  Top Layer w6: 2934.49,120.51 J2.8
  Top Layer w10: P1.2 500,1965 500,205 665,40 2853.98,40 2934.49,120.51
ROW_SELECT_5: J2.4 P1.1 | length 5598.3
  Top Layer w6: 2965.98,120.98 J2.4
  Top Layer w10: P1.1 475,2040 475,185.15 635.15,25 2870,25 2965.98,120.98
SCLK1: P1.13 U1.20 | length 2806.7
  Top Layer w10: U1.20 1060.94,598.23 1060.94,615.18 1062,616.24 1062,622.01 1080,640.01 v2(1080,955)
  Bottom Layer w10: v2(1080,955) 1080,1445 P1.13
SCLK2: P1.16 U2.20 | length 3166.9
  Top Layer w10: U2.20 1389.37,620.63 1350,660 1350,896.06 2105,1651.06 v2(2105,1950)
  Bottom Layer w10: v2(2105,1950) 2909.5,2754.5 2909.5,2845.5 2880.5,2874.5 2809.5,2874.5 P1.16
SCLK3: P1.19 U3.20 | length 2307.8
  Top Layer w10: U3.20 2780.63,1775.63 3060,2055 P1.19
VCC: J2.34 J2.36 J2.38 J2.40 J3.3 | length 2281.5
  Top Layer w50: v1(3615,540) 4165,1090 J3.3
  Bottom Layer w50: v2@2710,130 v2(2690,130) 2690,104.29 2731.29,63 3322.85,63 3615,355.15 v1(3615,540)
  other v2: 2720,130
pads on no net: J2.MP1 J2.MP2 J2.MP3 J2.MP4 U1.1 U1.17 U1.19 U1.25 U2.1 U2.17 U2.19 U2.25 U3.1 U3.17 U3.19 U3.25

## Polygon pours and split planes (outlines as drawn)
GND on Top Layer "GND_L01_P002" (solid, pour order 2): 0,0 0,3000 4420,3000 4420,0
GND on Top Layer "GND_L01_P005" (solid, pour order 5): 2880,600 2890,610 2950,610 2950,514.36 2945.64,510 2880,510
VCC on Top Layer "VCC_L01_P000" (solid, pour order 0): 2675,175 2735,175 2735,125 2725,115 2685,115 2675,125
GND on Bottom Layer "GND_L02_P003" (solid, pour order 3): 0,0 0,3000 4420,3000 4420,0

## Text inside footprints (layer, text, board x,y; h text height)
P1: Bottom Overlay "10" at 2140,2745 h40 r180; Bottom Overlay "1" at 1165,2850 h40 r180; Bottom Overlay "20" at 3245,2845 h40 r180